# Altium PCB Strain gauge.PcbDoc
Units mil, origin at the board's own origin, x right, y up, seen from the top; angles counter-clockwise.
Board outline 2887.01 x 1499.61 mil, 2 copper layers (Top, Bottom); 10 components, 20 nets, 88 pads, 0 vias.
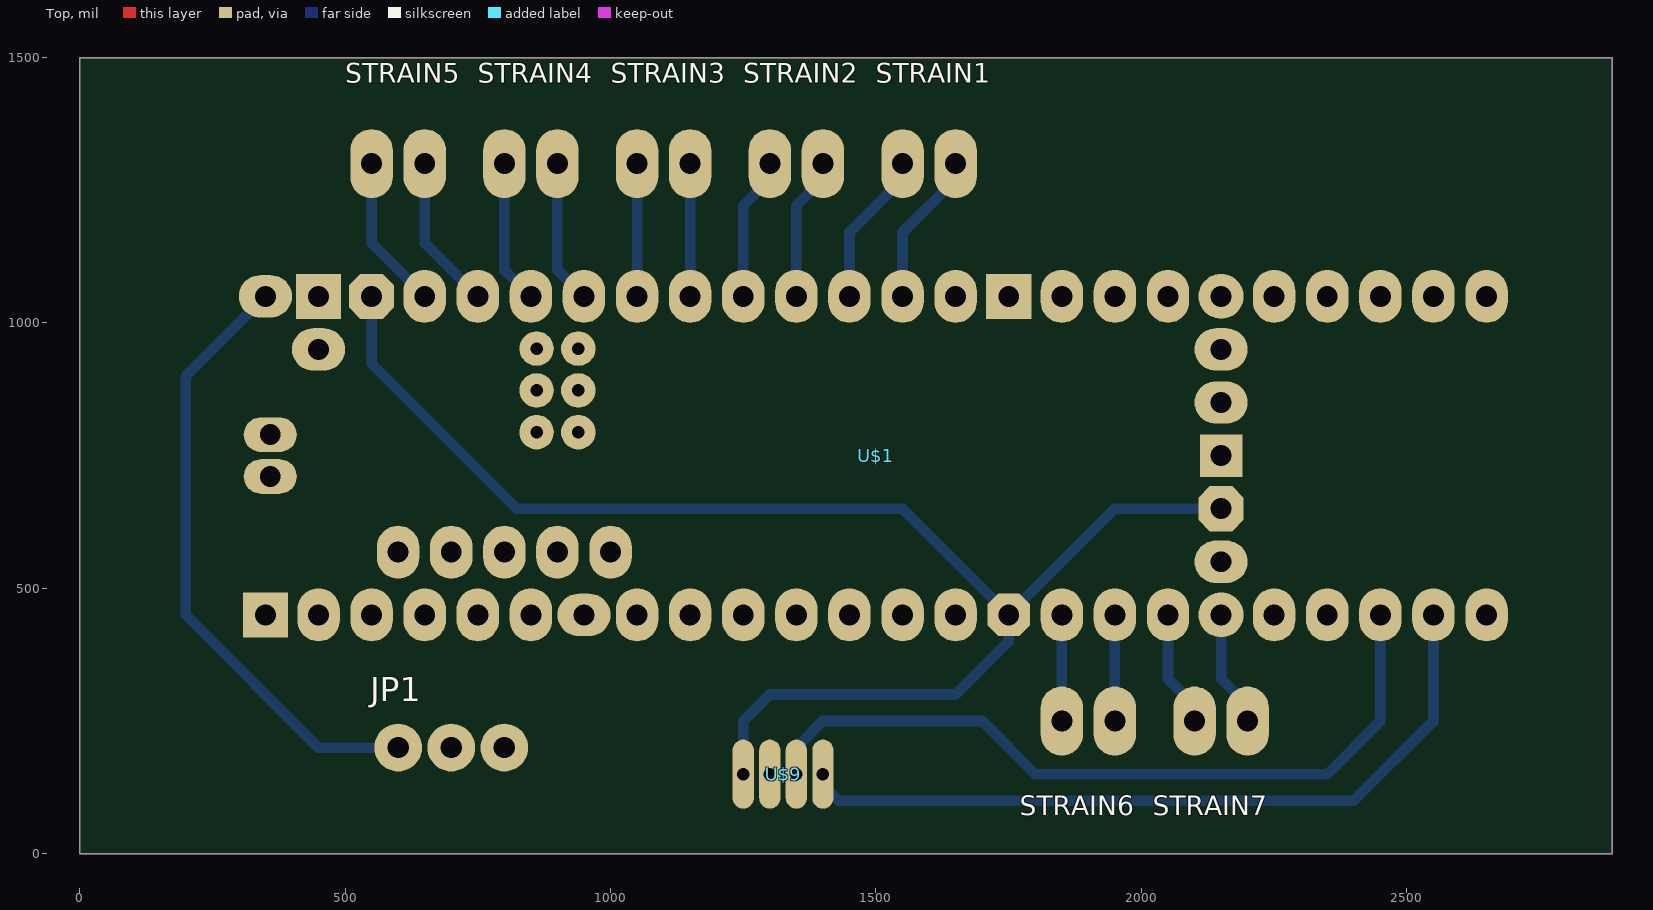
[diagram p0: Top view]
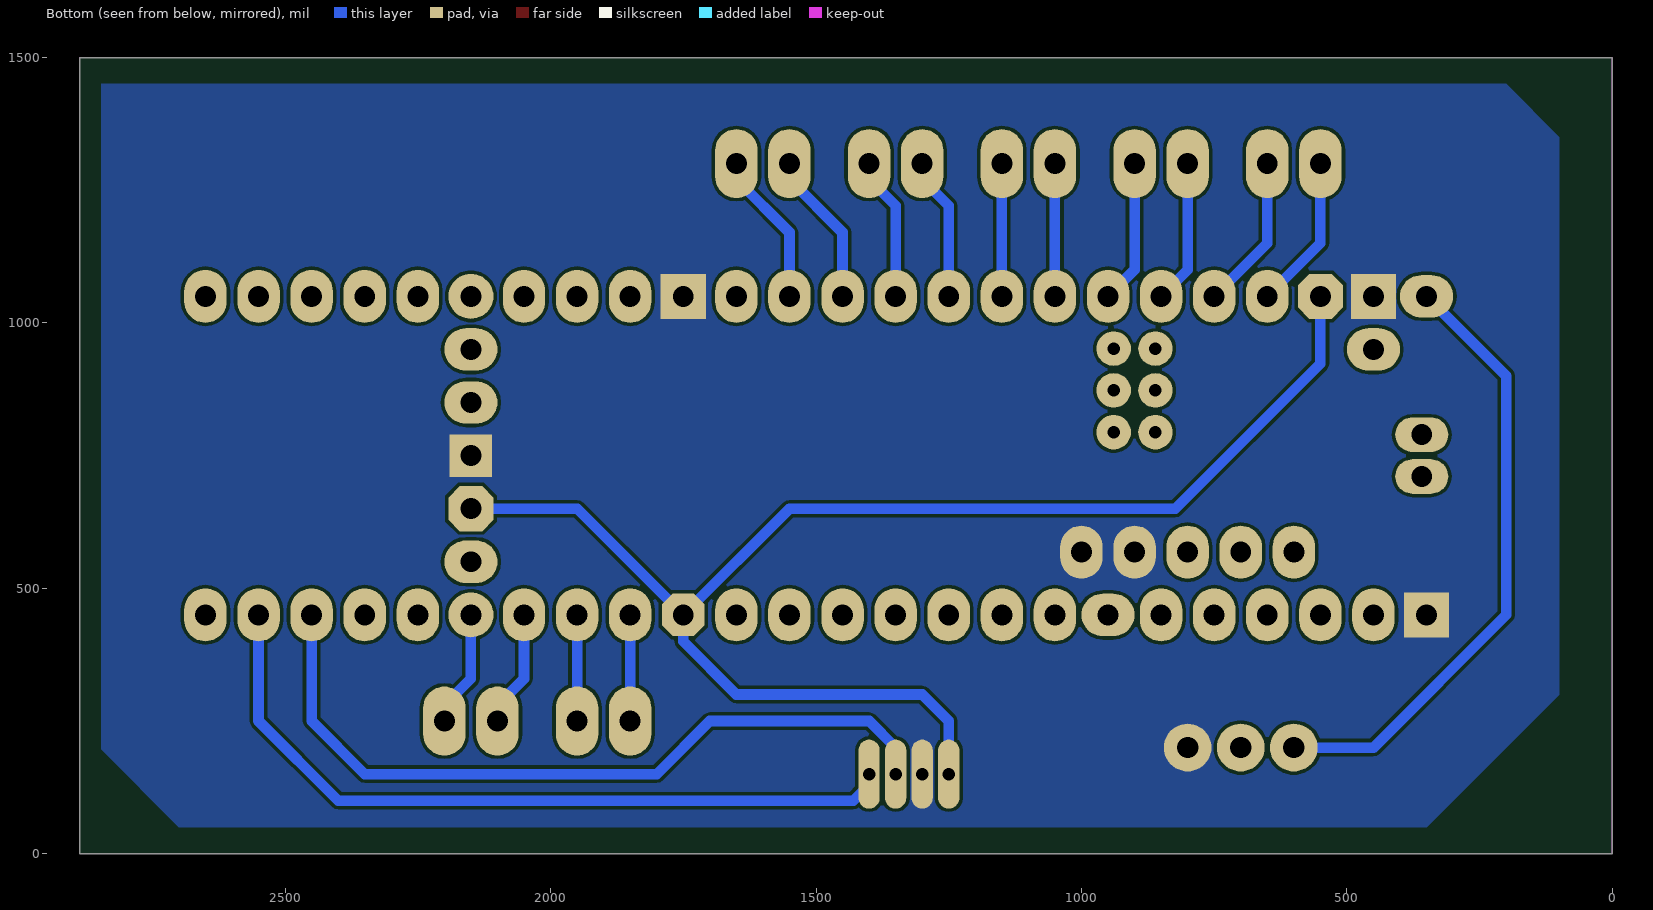
[diagram p1: Bottom view, seen from below]

## Layer stack, top to bottom
Top Solder: solder mask 0.4, Solder Resist, Dk 3.5
Top: signal copper 1.378
Dielectric 1: dielectric 12.6, FR-4, Dk 4.8
Bottom: signal copper 1.378
Bottom Solder: solder mask 0.4, Solder Resist, Dk 3.5

## Board outline
0,1499.61 0,0 2887.01,0 2887.01,1499.61

## Design rules (kind name [scope] priority, off if disabled: settings)
BoardOutlineClearance mdCopperDimension [All] p1: gap=10 ignorepadtopadclearanceinfootprint=FALSE except(0: Arc-SplitContinuation Track-SplitContinuation SMDPad-SplitContinuation THPad-SplitContinuation Via-SplitContinuation Fill-SplitContinuation Poly-SplitContinuation Region-SplitContinuation Text-SplitContinuation; 40: Poly-OutlineEdge Poly-CavityEdge Poly-CutoutEdge Poly-SplitBarrior)
Clearance "Clearance (Same Net)" [All] p1: gap=6 ignorepadtopadclearanceinfootprint=FALSE
Clearance [All] p2: gap=6 ignorepadtopadclearanceinfootprint=FALSE
HoleSize [All] p1: absolutevalues=TRUE maxlimit=100000 minlimit=13.78 maxpercent=80.000 minpercent=20.000
HoleToHoleClearance mdDrill [All] p1: gap=6 allowstackedmicrovias=TRUE
MinimumSolderMaskSliver [All] p1 off: minsoldermaskwidth=10
PasteMaskExpansion mlMinCreamFrame [All] p1: expansion=0
PolygonConnect PolygonConnect_For_PolygonThermal_ON_Width60000_Gap100000 [InPolygonClass('PolygonThermal_ON_Width60000_Gap100000') vs Not IsVia] p1: connectstyle=Relief reliefconductorwidth=6 reliefentries=4 polygonreliefangle="90 Angle" airgapwidth=10
PolygonConnect ThermalVias [IsVia] p2: connectstyle=Direct reliefconductorwidth=10 reliefentries=4 polygonreliefangle="90 Angle" airgapwidth=10
PolygonConnect [All] p3: connectstyle=Relief reliefconductorwidth=10 reliefentries=4 polygonreliefangle="90 Angle" airgapwidth=10
RoutingVias [All] p1: holewidth=13.78 width=29.78 viastyle="Through Hole" minholewidth=13.78 minwidth=29.78 maxholewidth=100 maxwidth=100
SolderMaskExpansion mlMinStopFrame [All] p1: expansion=4 istentingtop=FALSE
Width [All] p1: maxlimit=50 minlimit=12 preferedwidth=20 minimp=50.000000 maximp=50.000000 favimp=50.000000
26 further rules are at their usual default settings.

## Components (designator, comment, footprint, x,y, rotation, side; value= is the part's Value field where it differs from the comment)
JP1 "" 1X03 700,200 r0 top
STRAIN1 "22-23-2021" 22-23-2021 1600,1300 r0 top
STRAIN2 "22-23-2021" 22-23-2021 1350,1300 r0 top
STRAIN3 "22-23-2021" 22-23-2021 1100,1300 r0 top
STRAIN4 "22-23-2021" 22-23-2021 850,1300 r0 top
STRAIN5 "22-23-2021" 22-23-2021 600,1300 r0 top
STRAIN6 "22-23-2021" 22-23-2021 1900,250 r180 top
STRAIN7 "22-23-2021" 22-23-2021 2150,250 r180 top
U$1 "" TEENSY41 1550,750 r0 top
U$9 "" CAN_TEN 1150,100 r0 top

## Footprints (in the part's own frame and the unit in brackets; to place one, negate y for a bottom-side part, rotate by r counter-clockwise, add the part's x,y. Pads: shape width x height; smd on the part's side, far side on the other; paste and mask are expansions set on the pad)
1X03 [mil] "1X03"
  round 90 / inner round 60 / far side round 90 hole 40: 1(-100,0) 2(0,0) 3(100,0)
22-23-2021 [mil] "22-23-2021"
  oval 80x130 / inner oval 59.37x118.74 / far side oval 80x130 hole 39.37: 1(-50,0) 2(50,0)
CAN_TEN [mil] "CAN_TEN"
  oval 40x130 / inner oval 43.62x87.24 / far side oval 40x130 hole 23.62: P$1(100,50) P$2(150,50) P$3(200,50) P$4(250,50)
TEENSY41 [mil] "TEENSY41"
  oval 80x100 / inner round 59.37 / far side oval 80x100 hole 39.37: 0-RX1/CS1/CRX2(-1100,-300) 1-TX1/MISO1/CTX2(-1000,-300) 2-OUT2(-900,-300) 3-LRCLK2(-800,-300) 4-BCLK2(-700,-300) 6-OUT1D(-500,-300) 7-RX2/OUT1A(-400,-300) 8-TX2/IN2(-300,-300) 9-OUT1C(-200,-300) 10-CS\MQSR(-100,-300) 11-MOSI/CTX1(0,-300) 12-MISO/MQSL(100,-300) 13-SCK/LED(100,300) 14-A0/TX3/SPDIF_OUT(0,300) 15-A1/RX3/SPDIF_IN(-100,300) 16-A2/RX4/SCL1(-200,300) 17-A3/TX4/SDA1(-300,300) 18-A4/SDA0(-400,300) 19-A5/SCL0(-500,300) 20-A6/TX5/LRCLK1(-600,300) 21-A7/RX5/BCLK1(-700,300) 22-A8/CTX1(-800,300) 23-A9/CRX1/MCLK1(-900,300) 24-A10/TX6/SCL2(300,-300) 25-A11/RX6/SDA2(400,-300) 26-A12/MOSI1(500,-300) 28-RX7(700,-300) 29-TX7(800,-300) 30-CRX3(900,-300) 31-CTX3(1000,-300) 32-OUT1B(1100,-300) 33-MCLK2(1100,300) 34-RX8(1000,300) 35-TX8(900,300) 36-PWM(800,300) 37-PWM(700,300) 39-A15/CS/OUT1A(500,300) 40-A16/CS1(400,300) 41-A17/MISO1(300,300) +5V(-950,-181.89) DM(-850,-181.89) DP(-750,-181.89) GND4(-650,-181.89) GND5(-550,-181.89)
  oct 80x80 / inner round 54.85 / far side oct 80x80 hole 39.37: 3V3-1(200,-300)
  oct 85x85 / inner round 54.85 / far side oct 85x85 hole 39.37: 3V3-2(600,-100) 3V3-3(-1000,300)
  oval 100x80 / inner round 59.37 / far side oval 100x80 hole 39.37: 5-IN2(-600,-300) ON/OFF(600,200) PROGRAM(600,100) VBAT(600,-200) VUSB(-1100,200)
  round 85 / inner round 59.37 / far side round 85 hole 39.37: 27-A13/SCK1(600,-300) 38-A14/CS/IN1(600,300)
  oval 100x65 / inner round 59.37 / far side oval 100x65 hole 39.37: D+(-1190.94,-39.37) D-(-1190.94,39.37)
  round 65 / inner round 43.62 / far side round 65 hole 23.62: G(-610.63,122.83) LED(-689.37,122.83) R+(-689.37,201.57) R-(-610.63,201.57) T+(-610.63,44.09) T-(-689.37,44.09)
  rect 85x85 / inner round 54.85 / far side rect 85x85 hole 39.37: GND1(-1200,-300) GND3(200,300) GND6(-1100,300)
  rect 80x80 / inner round 54.85 / far side rect 80x80 hole 39.37: GND2(600,0)
  oval 100x80 / inner round 66 / far side oval 100x80 hole 39.37: VIN(-1200,300)

## Part data
JP1: library part PINHD-1X3, "PIN HEADER", DeviceSetName=PINHD-1X3, GateName_1=A, LibraryName=adafruit, SymbolName_1=PINHD3
STRAIN1 STRAIN2 STRAIN3 STRAIN4 STRAIN5 STRAIN6 STRAIN7: ".100\" (2.54mm) Center Header - 2 Pin", DeviceSetName=22-23-2021, GateName_1=-1, GateName_2=-2, LibraryName=con-molex, MF=MOLEX, MPN=22-23-2021, OC_FARNELL=1462926, OC_NEWARK=25C3832, POPULARITY=40, SymbolName_1=MV, SymbolName_2=M
U$1: library part TEENSY41, DeviceSetName=TEENSY41, GateName_1=G$1, LibraryName=teensy, SymbolName_1=TEENSY41, TEENSY4.1="TEENSY 4.1"
U$9: library part CAN_TEN, PackageName=CAN_TEN

## Nets (pads, with @x,y where several pads share a name; then routed paths per layer and width w, separated by ;. In a path a pad name is that pad's centre, name@x,y a point inside that pad or via, vN(x,y) a via of type N, cw(c..) or ccw(c..) an arc to the next point about the centre after c; other vN are vias at no path point)
3.3V: U$1.3V3-1 U$1.3V3-2 U$1.3V3-3 U$9.P$1 | length 2744.5
  Bottom w20: U$1.3V3-3@531,1031.54 549.46,1050 U$1.3V3-3 550,923.13 823.13,650 1550,650 U$1.3V3-1 ; U$9.P$1 1250,250 1300,300 1650,300 1750,400 U$1.3V3-1 ; U$1.3V3-2 1950,650 U$1.3V3-1
5V: JP1.1 U$1.VIN | length 1165.7
  Bottom w20: U$1.VIN 200,900 200,450 450,200 JP1.1
12V: JP1.2
CRX2: U$1.30-CRX3 U$9.P$3 | length 1453.6
  Bottom w20: U$9.P$3 1350,200 1400,250 1700,250 1800,150 2350,150 2450,250 U$1.30-CRX3
CTX2: U$1.31-CTX3 U$9.P$4 | length 1444.6
  Bottom w20: U$9.P$4 1400,130 1430,100 2400,100 2550,250 U$1.31-CTX3
GND: JP1.3 U$1.GND1 U$1.GND2 U$1.GND3 U$1.GND4 U$1.GND5 U$1.GND6 U$9.P$2
NetSTRAIN1_1: STRAIN1.1 U$1.15-A1/RX3/SPDIF_IN | length 291.4
  Bottom w20: U$1.15-A1/RX3/SPDIF_IN 1450,1170.32 1550,1270.32 STRAIN1.1
NetSTRAIN1_2: STRAIN1.2 U$1.14-A0/TX3/SPDIF_OUT | length 291.4
  Bottom w20: U$1.14-A0/TX3/SPDIF_OUT 1550,1170.32 1650,1270.32 STRAIN1.2
NetSTRAIN2_1: STRAIN2.1 U$1.17-A3/TX4/SDA1 | length 270.7
  Bottom w20: U$1.17-A3/TX4/SDA1 1250,1220.32 1300,1270.32 STRAIN2.1
NetSTRAIN2_2: STRAIN2.2 U$1.16-A2/RX4/SCL1 | length 270.7
  Bottom w20: U$1.16-A2/RX4/SCL1 1350,1220.32 1400,1270.32 STRAIN2.2
NetSTRAIN3_1: STRAIN3.1 U$1.19-A5/SCL0 | length 250
  Bottom w20: U$1.19-A5/SCL0 STRAIN3.1
NetSTRAIN3_2: STRAIN3.2 U$1.18-A4/SDA0 | length 250
  Bottom w20: U$1.18-A4/SDA0 STRAIN3.2
NetSTRAIN4_1: STRAIN4.1 U$1.21-A7/RX5/BCLK1 | length 270.7
  Bottom w20: STRAIN4.1 800,1100 U$1.21-A7/RX5/BCLK1
NetSTRAIN4_2: STRAIN4.2 U$1.20-A6/TX5/LRCLK1 | length 270.7
  Bottom w20: STRAIN4.2 900,1100 U$1.20-A6/TX5/LRCLK1
NetSTRAIN5_1: STRAIN5.1 U$1.23-A9/CRX1/MCLK1 | length 291.4
  Bottom w20: STRAIN5.1 550,1150 U$1.23-A9/CRX1/MCLK1
NetSTRAIN5_2: STRAIN5.2 U$1.22-A8/CTX1 | length 291.4
  Bottom w20: STRAIN5.2 650,1150 U$1.22-A8/CTX1
NetSTRAIN6_1: STRAIN6.1 U$1.25-A11/RX6/SDA2 | length 200
  Bottom w20: STRAIN6.1 U$1.25-A11/RX6/SDA2
NetSTRAIN6_2: STRAIN6.2 U$1.24-A10/TX6/SCL2 | length 200
  Bottom w20: STRAIN6.2 U$1.24-A10/TX6/SCL2
NetSTRAIN7_1: STRAIN7.1 U$1.27-A13/SCK1 | length 220.7
  Bottom w20: U$1.27-A13/SCK1 2150,329.69 2200,279.69 STRAIN7.1
NetSTRAIN7_2: STRAIN7.2 U$1.26-A12/MOSI1 | length 220.7
  Bottom w20: U$1.26-A12/MOSI1 2050,329.69 2100,279.69 STRAIN7.2
pads on no net: U$1.0-RX1/CS1/CRX2 U$1.1-TX1/MISO1/CTX2 U$1.2-OUT2 U$1.3-LRCLK2 U$1.4-BCLK2 U$1.5-IN2 U$1.6-OUT1D U$1.7-RX2/OUT1A U$1.8-TX2/IN2 U$1.9-OUT1C U$1.10-CS\MQSR U$1.11-MOSI/CTX1 U$1.12-MISO/MQSL U$1.13-SCK/LED U$1.28-RX7 U$1.29-TX7 U$1.32-OUT1B U$1.33-MCLK2 U$1.34-RX8 U$1.35-TX8 U$1.36-PWM U$1.37-PWM U$1.38-A14/CS/IN1 U$1.39-A15/CS/OUT1A U$1.40-A16/CS1 U$1.41-A17/MISO1 U$1.+5V U$1.D+ U$1.D- U$1.DM U$1.DP U$1.G U$1.LED U$1.ON/OFF U$1.PROGRAM U$1.R+ U$1.R- U$1.T+ U$1.T- U$1.VBAT U$1.VUSB

## Polygon pours and split planes (outlines as drawn)
GND on Bottom "GND_L02_P000" (solid, pour order 0): 2850,1450 200,1450 100,1350 100,300 350,50 2700,50 2850,200

## Keep-outs
Keep-Out Layer:
  the board outline again, w0

## Silkscreen, mask and mechanical layers (free items; w line width, h text height)
Dimension:
  the board outline again, w0

## Text inside footprints (layer, text, board x,y; h text height)
U$1: tPlace "POGO" at 420.78,703.76 h37.2 r90; tPlace "COIN CEL" at 1960,533 h37.2; tPlace "3 VOLT" at 1995,560 h37.2; tPlace "USB" at 459.89,705.74 h49.6 r90; tPlace "TEENSY 4.1" at 1250,750 h77.5